# EAGLE board BLE -- HM-10 -- Breakout v.9 (EAGLE 6.4)
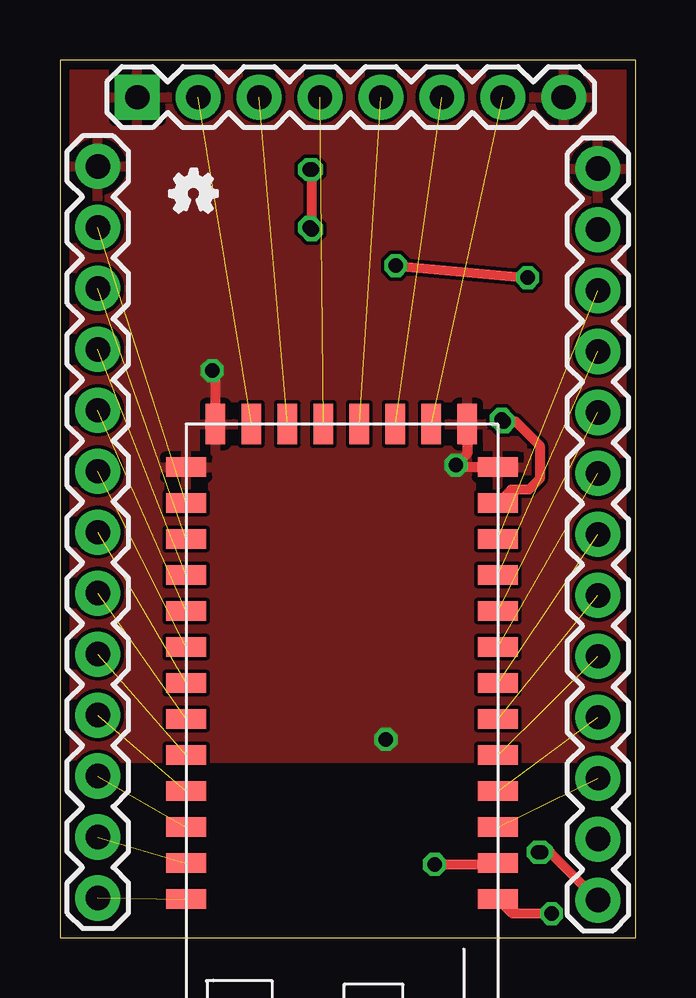
[diagram p0: board, top side]
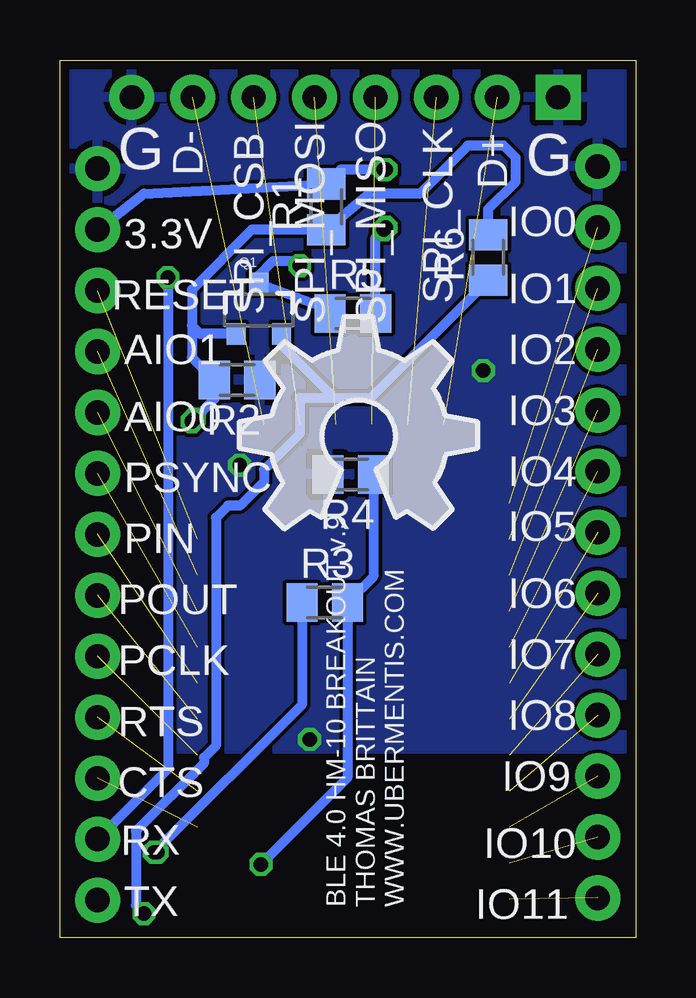
[diagram p1: board, bottom side, seen from below]

Size 24 x 36.57 mm. Coordinates in mm from the lower left corner, seen from the top.
Outline: 0,0 24,0 24,36.57 0,36.57 0,0
Copper layers (1*16): Top 0.0356mm / dielectric 1.5011mm / Bottom 0.0356mm
Design rules "LaenPCBOrder *": minimum track width 12mil, minimum drill 13mil, track to track 6mil, track to pad 6mil, pad to pad 6mil, via to via 6mil, smd to smd 6mil, copper to edge 15mil, drill to drill 6mil, minimum pad ring 7mil, minimum via ring 7mil, stop-mask expansion 4mil, vias tented up to drill 0mil, thermal gap 10mil

## Footprints (pad centres in the part's own frame; a part is rotated, then mirrored left to right if it is on the bottom)
1X13 = drill 1.016 pad 1.88: 1 0,0; 2 2.54,0; 3 5.08,0; 4 7.62,0; 5 10.16,0; 6 12.7,0; 7 15.24,0; 8 17.78,0; 9 20.32,0; 10 22.86,0; 11 25.4,0; 12 27.94,0; 13 30.48,0
1X08 = drill 1.016 pad 1.88 square: 1 0,0 | drill 1.016 pad 1.88: 2 2.54,0; 3 5.08,0; 4 7.62,0; 5 10.16,0; 6 12.7,0; 7 15.24,0; 8 17.78,0
SOT23-3 = smd 0.8 x 0.9: 1 -0.95,-1; 2 0.95,-1; 3 0,1.1
M0805 = smd 1.3 x 1.6: 1 -0.95,0; 2 0.95,0
BLE-HM-10 = smd 1.676 x 0.813: 3.3V 0,3.29; AIO0 0,7.79; AIO1 0,6.29; GND1 0,1.79; GND4 13,1.79; PCM_CLK 0,13.79; PCM_IN 0,10.79; PCM_OUT 0,12.29; PCM_SYNC 0,9.29; PIO0 13,3.29; PIO1 13,4.79; PIO2 13,6.29; PIO3 13,7.79; PIO4 13,9.29; PIO5 13,10.79; PIO6 13,12.29; PIO7 13,13.79; PIO8 13,15.29; PIO9 13,16.79; PIO10 13,18.29; PIO11 13,19.79; RESET 0,4.79; UART_CTS 0,16.79; UART_RTS 0,15.29; UART_RX 0,18.29; UART_TX 0,19.79 | smd 0.813 x 1.676: GND2 1.27,0; GND3 11.77,0; SPI_CLK 8.77,0; SPI_CSB 4.27,0; SPI_MISO 7.27,0; SPI_MOSI 5.77,0; USB_D+ 10.27,0; USB_D- 2.77,0

## Placement (x,y rotation side)
JP1  M13  [1X13]  22.43,32.04 270 top
JP2  M13  [1X13]  1.58,1.65 90 top
JP3  [1X08]  3.22,35.02 0 top
Q1  MOSFET-NCHANNELSMD  [SOT23-3]  15.71,26.15 0 bottom
R1  10k  [M0805]  12.89,30.45 90 bottom
R2  20k  [M0805]  16.62,23.23 180 bottom
R3  10k  [M0805]  12.96,13.96 0 bottom
R4  10k  [M0805]  11.88,19.3 180 bottom
R5  10k  [M0805]  11.78,26 0 bottom
R6  10k  [M0805]  6.14,28.34 90 bottom
U$1  BLE-HM-10  [BLE-HM-10]  18.26,21.4 180 top
U$2  [OSHW_FILLX350_NOTEXT]  16.51,17.02 0 bottom
U$3  [OSHW_FILLX70_NOTEXT]  4.57,30.23 0 top

## Library data of the parts
JP1-JP3 Q1 = SparkFun
R1-R6 = resistor
U$1 = Random parts
U$2 U$3 = ohw-logo

## Nets
3_3V: Q1.1 R1.1 R2.2 R6.2 U$1.3.3V
5V: JP1.2 R1.2 R5.2
GND: JP1.1 JP2.13 JP3.1 JP3.8 R2.1 R4.2 U$1.GND1 U$1.GND2 U$1.GND3 U$1.GND4
HVTX->LVRX: R3.2 R4.1 U$1.UART_RX
LVRX->HVTX: Q1.2 R6.1 U$1.UART_TX
N$3: JP1.3 U$1.RESET
N$4: JP1.4 U$1.AIO1
N$5: JP1.5 U$1.AIO0
N$6: JP1.6 U$1.PCM_SYNC
N$7: JP1.7 U$1.PCM_IN
N$8: JP1.8 U$1.PCM_OUT
N$9: JP1.9 U$1.PCM_CLK
N$10: JP1.10 U$1.UART_RTS
N$11: JP1.11 U$1.UART_CTS
N$14: JP2.1 U$1.PIO11
N$15: JP2.2 U$1.PIO10
N$16: JP2.3 U$1.PIO9
N$17: JP2.4 U$1.PIO8
N$18: JP2.5 U$1.PIO7
N$19: JP2.6 U$1.PIO6
N$20: JP2.7 U$1.PIO5
N$21: JP2.8 U$1.PIO4
N$22: JP2.9 U$1.PIO3
N$23: JP2.10 U$1.PIO2
N$24: JP2.11 U$1.PIO1
N$25: JP2.12 U$1.PIO0
N$28: JP3.2 U$1.USB_D+
N$29: JP3.3 U$1.SPI_CLK
N$30: JP3.4 U$1.SPI_MISO
N$31: JP3.5 U$1.SPI_MOSI
N$32: JP3.6 U$1.SPI_CSB
N$33: JP3.7 U$1.USB_D-
RX_HV: JP1.12 Q1.3 R5.1
TX_HV: JP1.13 R3.1

## Tracks (layer width: path | path; a pad name or v marks a point on that pad's centre or on a via)
3_3V  (via drill 0.6)
  Top 0.406: v18.5,21.5 19,21.5 20,20.5 20,19.11 19.56,18.67 18.82,18.67 U$1.3.3V
  Bottom 0.406: R6.2 6.14,30.36 5,31.5 5,32.5 5.5,33 7,33 9,31 11.1,31 R1.1 16,29.5 18.5,27 18.5,25.5 | 18.5,25.5 18.5,24.17 R2.2 17.57,22.43 v18.5,21.5 | Q1.1 18.15,25.15 18.5,25.5
5V  (via drill 0.6)
  Top 0.406: v10.5,29.5 v10.5,32
  Bottom 0.406: JP1.2 20.5,31 R1.2 12.29,32 v10.5,32 | R5.2 10.83,29.17 v10.5,29.5
GND  (via drill 0.6)
  Top 0.406: U$1.GND3 6.49,23.49 6.5,23.5 | U$1.GND1 16.59,19.61 v16.51,19.68 16.99,20.16 U$1.GND2
  other vias: 6.35,23.62 13.59,8.26
  pour Bottom: -0.51,7.87 24.64,7.87 24.64,8.13 24.64,37.34 -0.51,37.34 -0.51,36.32
  pour Top: 0.5,36 0.5,7.5 24,7.5 24,8 24,36.5 0.5,36.5 0.5,36
HVTX->LVRX  (via drill 0.6)
  Top 0.406: v15.62,3.05 18.2,3.05 U$1.UART_RX
  Bottom 0.406: R4.1 10.93,15.04 R3.2 12.01,6.66 v15.62,3.05
LVRX->HVTX  (via drill 0.6)
  Top 0.406: v20.5,1 18.87,1 U$1.UART_TX
  Bottom 0.406: 12.57,22.5 14,22.5 14,21 15.5,19.5 15.5,19 16.5,18 17,18 17.5,17.5 17.5,8 18,7.5 18,7.27 20.83,4.45 20.83,1.33 v20.5,1 | 12.57,22.5 11.03,22.5 R6.1 | Q1.2 14.76,24.68 12.57,22.5
N$1  (via drill 0.6)
  other vias: 10.41,29.59
N$2  (via drill 0.6)
  other vias: 10.41,32
N$3  (1 unrouted)
N$4  (1 unrouted)
N$5  (1 unrouted)
N$6  (1 unrouted)
N$7  (1 unrouted)
N$8  (1 unrouted)
N$9  (1 unrouted)
N$10  (1 unrouted)
N$11  (1 unrouted)
N$14  (1 unrouted)
N$15  (1 unrouted)
N$16  (1 unrouted)
N$17  (1 unrouted)
N$18  (1 unrouted)
N$19  (1 unrouted)
N$20  (1 unrouted)
N$21  (1 unrouted)
N$22  (1 unrouted)
N$23  (1 unrouted)
N$24  (1 unrouted)
N$25  (1 unrouted)
N$26  (via drill 0.6)
  other vias: 18.41,21.59
N$27  (via drill 0.6)
  other vias: 19.94,3.56
N$28  (1 unrouted)
N$29  (1 unrouted)
N$30  (1 unrouted)
N$31  (1 unrouted)
N$32  (1 unrouted)
N$33  (1 unrouted)
RX_HV  (via drill 0.6)
  Top 0.406: v14,28 v19.5,27.5
  Bottom 0.406: R5.1 12.99,26.25 Q1.3 15.71,27.6 15.11,28.19 14.19,28.19 v14,28 | v19.5,27.5 19.5,7.03 JP1.12
TX_HV  (via drill 0.6)
  Top 0.406: v20.07,3.56 20.44,3.56 JP1.13
  Bottom 0.406: R3.1 13.91,9.71 v20.07,3.56

## Text on the board
bNames: D+ | SPI_CLK | SPI_MISO | SPI_MOSI | SPI_CSB | G | D- | G | IO0 | 3.3V | IO1 | RESET | IO2 | AIO1 | IO3 | AIO0 | IO4 | PSYNC | IO5 | PIN | IO6 | POUT | IO7 | PCLK | IO8 | RTS | IO9 | CTS | IO10 | RX | IO11 | BLE 4.0 HM-10 BREAKOUT v.9 / THOMAS BRITTAIN / WWW.UBERMENTIS.COM | TX